# EAGLE board 4 output Igniter (EAGLE 6.2)
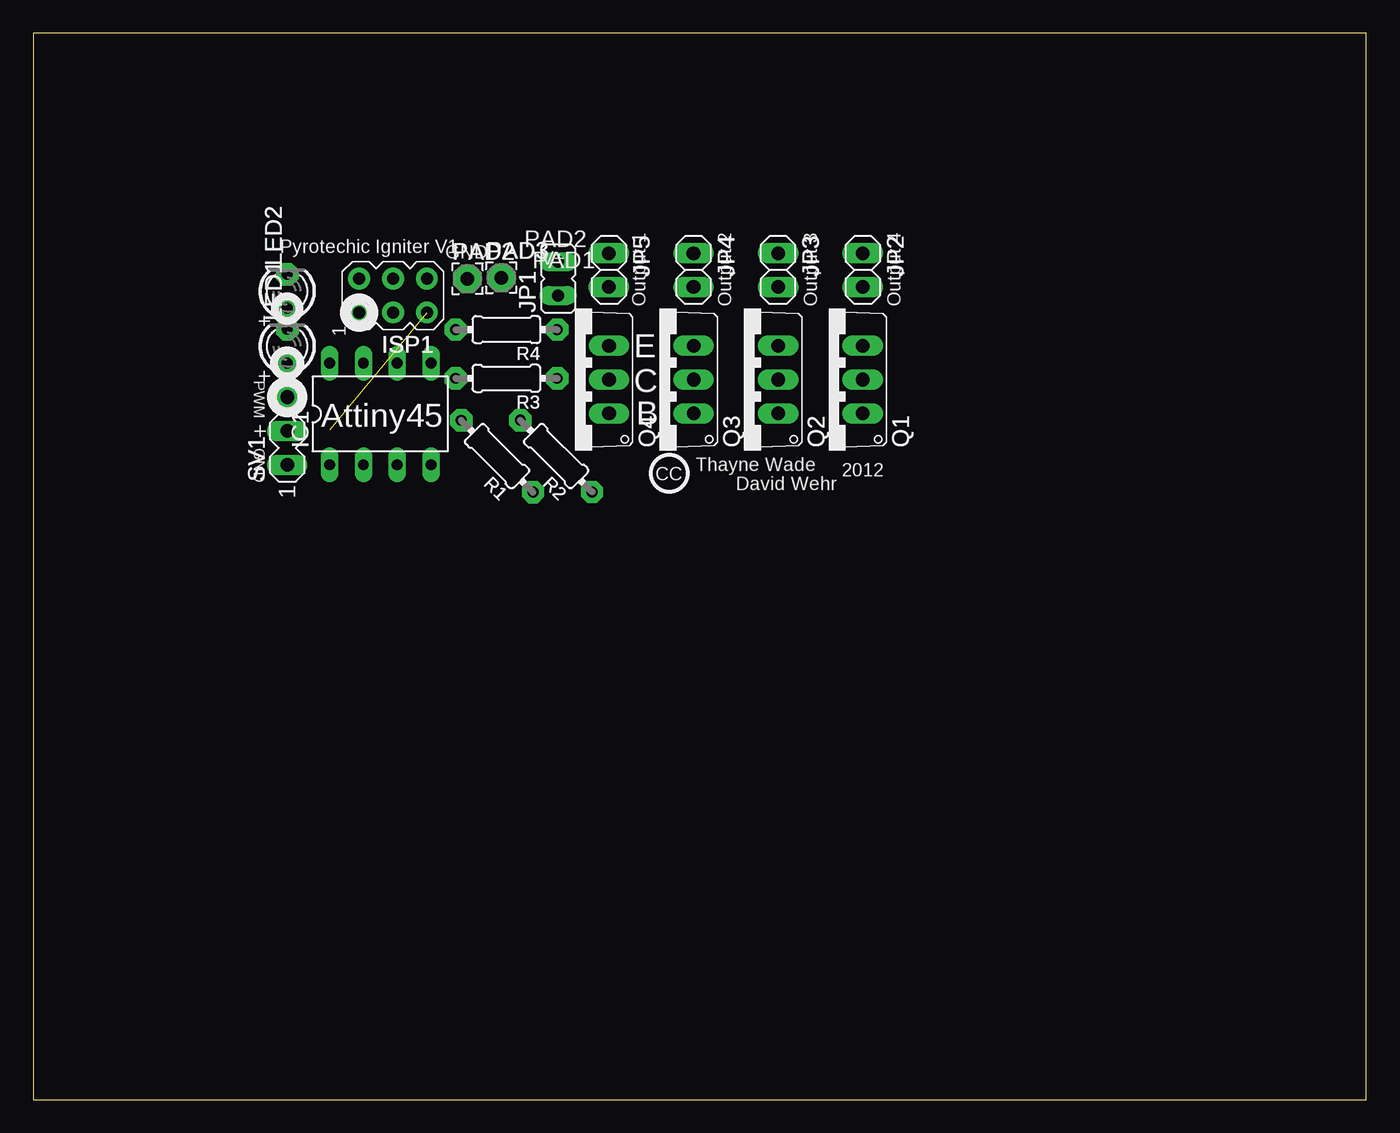
[diagram p0: board, top side]
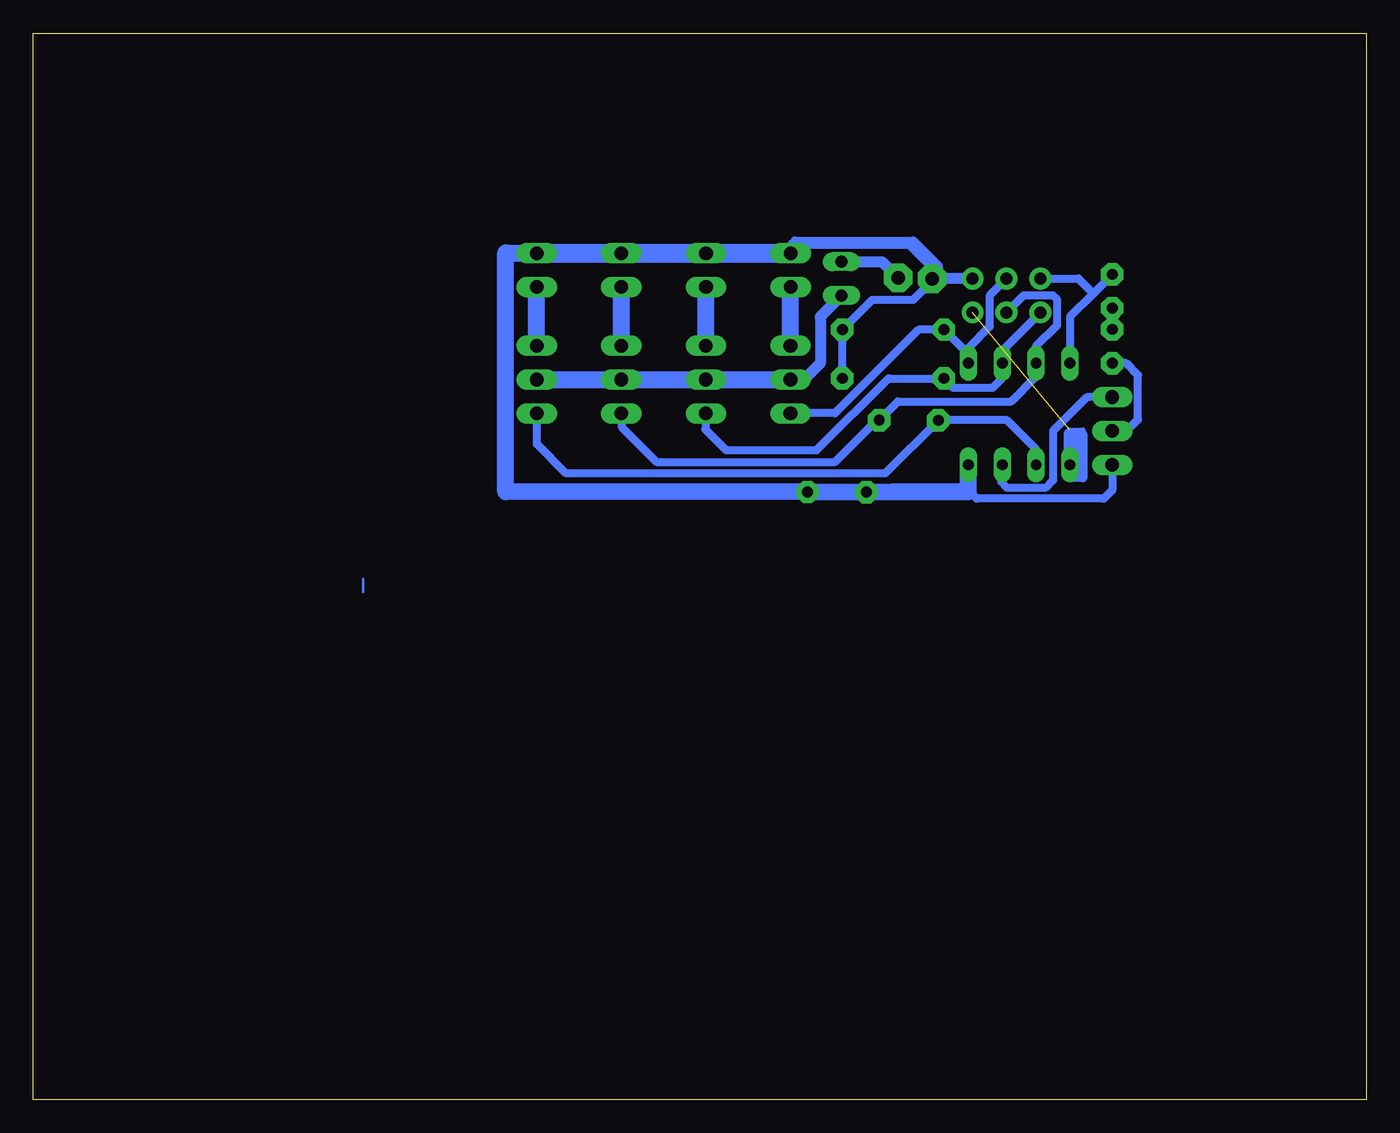
[diagram p1: board, bottom side, seen from below]

Size 100 x 80 mm. Coordinates in mm from the lower left corner, seen from the top.
Outline: 0,0 100,0 100,80 0,80 0,0
Copper layers (1*16): Top 0.035mm / dielectric 1.5mm / Bottom 0.035mm
Design rules: minimum track width 10mil, minimum drill 24mil, track to track 8mil, track to pad 8mil, pad to pad 8mil, via to via 8mil, smd to smd 8mil, copper to edge 40mil, drill to drill 8mil, minimum pad ring 10mil, minimum via ring 8mil, stop-mask expansion 4mil, vias tented up to drill 0mil, thermal gap 10mil

## Footprints (pad centres in the part's own frame; a part is rotated, then mirrored left to right if it is on the bottom)
DIL08 = drill 0.813 long: 1 -3.81,-3.81; 2 -1.27,-3.81; 3 1.27,-3.81; 4 3.81,-3.81; 5 3.81,3.81; 6 1.27,3.81; 7 -1.27,3.81; 8 -3.81,3.81
AVRISP = drill 0.9 pad 1.626: 1 -1.27,2.54; 2 1.27,2.54; 3 -1.27,0; 4 1.27,0; 5 -1.27,-2.54; 6 1.27,-2.54
JP1 = drill 0.914 long: 1 0,-1.27; 2 0,1.27
1X02 = drill 1.016 long: 1 -1.27,0; 2 1.27,0
LED3MM = drill 0.813 pad 1.676 octagon: A -1.27,0; K 1.27,0
2,15/1,0 = drill 1.016 pad 2.159 octagon: 1 0,0
TO220V = drill 1.016 long: 1 -2.54,-2.54; 2 0,-2.54; 3 2.54,-2.54
0204/7 = drill 0.813 pad 1.676 octagon: 1 -3.81,0; 2 3.81,0
MA03-1 = drill 1.016 long: 1 -2.54,0; 2 0,0; 3 2.54,0

## Placement (x,y rotation side)
IC1  TINY85  [DIL08]  26.04,51.44 0 top
ISP1  AVRISP-6  [AVRISP]  26.99,60.33 90 top
JP1  [JP1]  39.37,61.59 0 top
JP2  [1X02]  62.23,62.23 270 top
JP3  [1X02]  55.88,62.23 270 top
JP4  [1X02]  49.53,62.23 270 top
JP5  [1X02]  43.18,62.23 270 top
LED1  [LED3MM]  19.05,56.52 90 top
LED2  [LED3MM]  19.05,60.64 90 top
PAD2  - Flight Pack  [2,15/1,0]  32.57,61.58 0 top
PAD3  + Flight Pack  [2,15/1,0]  35.11,61.66 0 top
Q1  [TO220V]  59.68,54.02 90 top
Q2  [TO220V]  53.34,54.02 90 top
Q3  [TO220V]  47,54.02 90 top
Q4  [TO220V]  40.66,54.02 90 top
R1  1M  [0204/7]  34.8,48.27 135 top
R2  1M  [0204/7]  39.23,48.28 135 top
R3  1M  [0204/7]  35.49,54.11 180 top
R4  1M  [0204/7]  35.49,57.76 180 top
SV1  [MA03-1]  19.05,50.16 90 top

## Library data of the parts
IC1 = atmel; OC_FARNELL: unknown; OC_NEWARK: unknown
ISP1 LED1 LED2 Q1-Q4 R1-R4 = adafruit
JP1 = jumper
JP2-JP5 = pinhead
PAD2 PAD3 = wirepad
SV1 = con-lstb; OC_FARNELL: unknown; OC_NEWARK: unknown

## Nets
+5V: IC1.8 ISP1.2 LED2.K
FP: JP1.1 Q1.2 Q2.2 Q3.2 Q4.2
GND: IC1.4 ISP1.6 JP2.1 JP3.1 JP4.1 JP5.1 PAD2.1 R1.1 R2.1 R3.1 R4.1 SV1.1
N$1: IC1.7 ISP1.3 Q2.1 R2.2
N$2: IC1.6 ISP1.1 Q3.1 R3.2
N$3: JP1.2 PAD3.1
N$4: IC1.1 ISP1.5
N$5: IC1.3 SV1.3
N$6: LED1.A SV1.2
N$7: LED1.K LED2.A
N$8: IC1.2 Q1.1 R1.2
N$9: JP2.2 Q1.3
N$10: JP3.2 Q2.3
N$11: JP4.2 Q3.3
N$12: JP5.2 Q4.3
N$16: IC1.5 ISP1.4 Q4.1 R4.2

## Tracks (layer width: path | path; a pad name or v marks a point on that pad's centre or on a via)
+5V
  Bottom 0.61: LED2.K 20.48,60.48 | 20.48,60.48 22.23,58.74 IC1.8 | ISP1.2 21.59,61.59 20.48,60.48
FP
  Bottom 0.813: JP1.1 40.96,58.74 40.96,55.24 42.18,54.02 Q4.2
  Bottom 1.27: Q1.2 Q2.2 55.85,54.02 | 55.85,54.02 55.85,53.94 | 55.85,54.02 Q3.2 | Q3.2 | Q3.2 43.15,54.02 | 43.15,54.02 43.15,54.11 | Q4.2 43.15,54.02 | 43.15,54.02
GND
  Bottom 0.61: SV1.1 19.05,45.72 19.68,45.09 29.21,45.09 29.84,45.72 IC1.4 | R3.1 R4.1 37.06,60.01 33.97,60.01 32.57,61.41 PAD2.1 32.57,62.41 34.29,64.14 42.55,64.14 JP5.1 43.18,64.14 42.86,64.45 33.97,64.45 32.07,62.55 32.07,61.59 32.38,61.28 33.02,61.91
  Bottom 0.813: ISP1.6 29.54,61.58 PAD2.1
  Bottom 1.27: 35.49,45.6 R2.1 64.55,45.6 64.55,63.51 JP2.1 | 35.49,45.6 29.84,45.6 IC1.4 | R1.1 35.49,45.6 | 35.49,45.6
  Bottom 1.422: JP2.1 JP3.1 JP4.1 JP5.1
N$1
  Bottom 0.61: ISP1.3 25.72,60.33 23.5,60.33 23.18,60.01 23.18,58.1 24.77,56.52 IC1.7 24.77,54.23 26.62,52.37 35.13,52.37 R2.2 36.72,50.97 39.84,47.85 53.24,47.85 55.85,50.46 55.85,51.45 Q2.1
N$2
  Bottom 0.61: ISP1.1 27.3,56.2 IC1.6 27.3,54.12 28.01,53.41 30.99,53.41 R3.2 35.84,54.11 41.24,48.72 48.02,48.72 49.59,50.28 49.59,51.43 Q3.1
N$3
  Bottom 0.813: JP1.2 36.32,62.87 PAD3.1
N$4  (1 unrouted)
  Bottom 0.305: 22.27,49.94 22.27,50.28 21.23,50.28 21.23,48.37
  Bottom 0.61: 21.75,49.41 22.1,49.41 22.1,46.63 21.23,46.63 21.23,48.37 21.23,49.94 22.27,49.94 22.27,46.98 21.75,46.98 21.75,49.41 | 21.75,49.41 21.75,49.59
  Bottom 0.813: IC1.1 22.27,47.62 22.27,49.94
N$5
  Bottom 0.61: SV1.3 20.95,52.7 23.5,50.16 23.5,46.47 24.07,45.89 26.92,45.89 27.39,46.36 27.39,47.55 IC1.3
N$6
  Bottom 0.61: SV1.2 17.98,50.16 17.12,51.02 17.12,54.37 18.01,55.25 19.05,55.25 LED1.A
N$7
  Bottom 0.61: LED1.K LED2.A
N$8
  Bottom 0.61: IC1.2 24.71,47.68 24.71,48.72 26.97,50.98 32.19,50.98 32.17,50.96 R1.2 36.09,46.98 60.03,46.98 62.22,49.17 Q1.1
N$9
  Bottom 1.27: Q1.3 JP2.2
N$10
  Bottom 1.27: Q2.3 JP3.2
N$11
  Bottom 1.27: Q3.3 JP4.2
N$12
  Bottom 1.27: Q4.3 43.18,56.56 JP5.2
N$13
  Bottom 0.203: 75.25,39.05 75.25,38.1
N$16
  Bottom 0.61: ISP1.4 28.26,60.32 28.26,57.98 29.84,56.4 IC1.5 29.84,55.94 31.67,57.77 R4.2 33.58,57.77 39.84,51.5 43.17,51.5 Q4.1

## Text on the board
tPlace: Pyrotechic Igniter V1 | GND | V+ | Output 1 | Output 2 | Output 3 | Output 4 | E | PWM | C | B | + | Attiny45 | GND | Thayne Wade | 2012 | CC | David Wehr
_tNames: JP5 | JP5 | JP5 | JP4 | JP4 | JP4 | JP3 | JP3 | JP3 | JP2 | JP2 | JP2 | PAD2 | LED2 | LED2 | LED2 | PAD2 | PAD2 | PAD3 | PAD3 | PAD1 | JP1 | JP1 | LED1 | LED1 | LED1 | ISP1 | ISP1 | ISP1 | R4 | R4 | R4 | R3 | R3 | R3 | IC1 | IC1 | IC1 | Q4 | Q4 | Q4 | Q3 | Q3 | Q3 | Q2 | Q2 | Q2 | Q1 | Q1 | Q1 | SV1 | SV1 | SV1 | R1 | R1 | R1 | R2 | R2 | R2